# Altium PCB PCB1.PcbDoc (part 2 of 2)
Units mil, origin at the board's own origin, x right, y up, seen from the top; angles counter-clockwise.
Board outline 3935 x 3935 mil, 2 copper layers (Top Layer, Bottom Layer); 151 components, 133 nets, 573 pads, 224 vias.
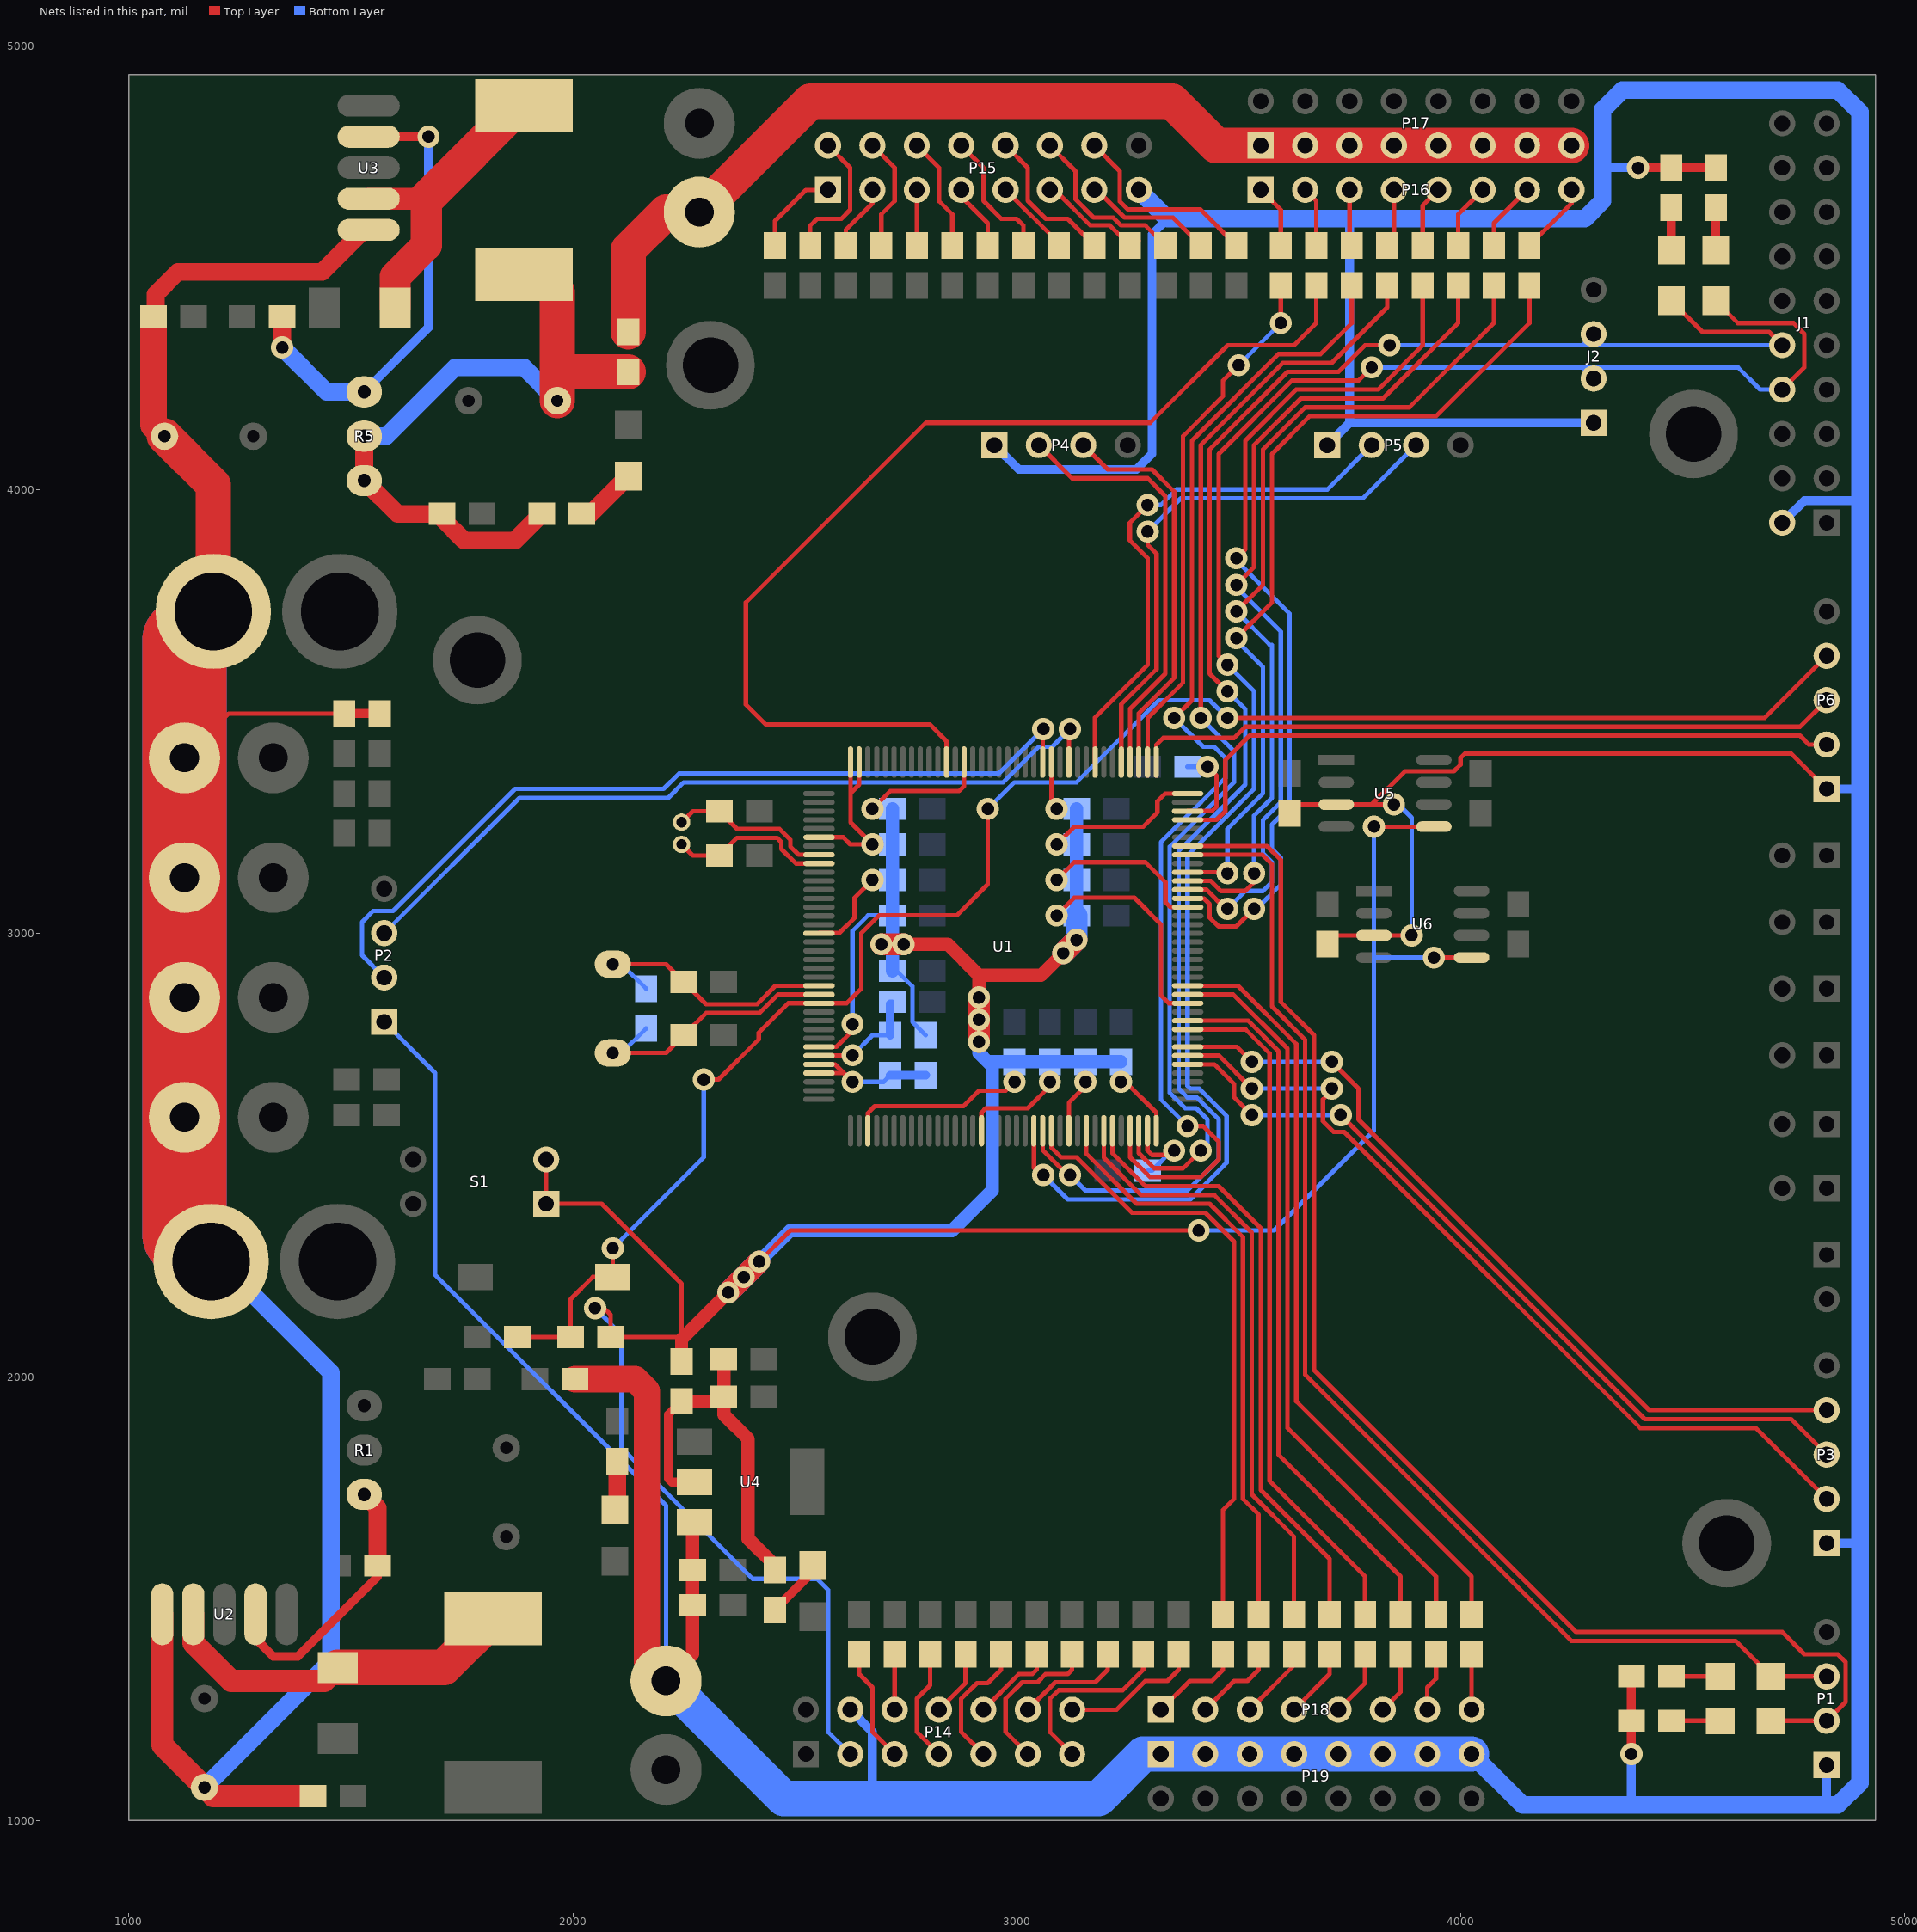
[diagram p2: the nets of this part, all layers, seen from the top]

## Via types
v1: diameter 50, hole 28, Top Layer to Bottom Layer, tented both sides, 126 vias
v2: diameter 30, hole 20, Top Layer to Bottom Layer, tented both sides, 98 vias

## Nets (pads, with @x,y where several pads share a name; then routed paths per layer and width w, separated by ;. In a path a pad name is that pad's centre, name@x,y a point inside that pad or via, vN(x,y) a via of type N, cw(c..) or ccw(c..) an arc to the next point about the centre after c; other vN are vias at no path point) (continued)
NetC7_1: C7.1 C8.1 L2.2 R5.2 R5.3 R7.1 R8.1 | length 1578.5
  Top Layer w20: C7.1@1705,3935 C7.1@1705,3945
  Top Layer w40: R5.2@1530,4120 R5.3@1530,4020 1605,3945 C7.1@1705,3945 ; C7.1@1705,3935 1755,3885 1870,3885 R7.1@1930,3945
  Top Layer w80: L2.2@1925,4485 1965,4445 1965,4265 ; C8.1@1965,4200 1965,4265 ; R8.1@2125,4265 1965,4265
  Bottom Layer w40: R5.2@1530,4120 1580,4120 1735,4275 1890,4275 C8.1@1965,4200
NetC11_1: C11.1 C12.2 R9.1 R65.2 U4.2 | length 870.5
  Top Layer w10: C12.2@2330,1945 C12.2@2340,1955
  Top Layer w20: R9.1@2245,1945 2215,1915 2215,1771 2223,1763 U4.2@2274,1763 ; R65.2@2455,1565 R65.2@2455,1575
  Top Layer w30: R9.1@2245,1945 C12.2@2330,1945 ; C11.1@2340,2040 C12.2@2340,1955 2340,1915 2395,1860 2395,1635 R65.2@2455,1575
NetC19_1: C19.1 R20.2 U1.23 Y1.1 | length 616.9
  Top Layer w10: Y1.1@2090,2930 2210,2930 C19.1@2250,2890 2300,2840 2415,2840 2456.42,2881.42 U1.23@2554.65,2881.42
  Bottom Layer w10: Y1.1@2090,2930 2110,2930 R20.2@2165,2875
NetC20_1: C20.1 R20.1 U1.24 Y1.2 | length 617
  Top Layer w10: Y1.2@2090,2730 2210,2730 C20.1@2250,2770 2300,2820 2420.46,2820 2462.19,2861.73 U1.24@2554.65,2861.73
  Bottom Layer w10: Y1.2@2090,2730 2110,2730 R20.1@2165,2785
NetC21_2: C21.2 U1.106 | length 212
  Top Layer w10: U1.106@3385.35,3275.12 3440.12,3275.12 3450,3285 3450,3355 v1(3430,3375)
  Bottom Layer w10: C21.2@3385,3375 v1(3430,3375)
NetC22_2: C22.2 U1.71 | length 198.7
  Top Layer w10: U1.71@3294.8,2554.65 3294.8,2510.2 3305,2500 3345,2500 v1(3355,2510)
  Bottom Layer w10: C22.2@3295,2465 3305,2465 3355,2515 v1(3355,2510)
NetC23_2: C23.2 U1.8 Y2.2 | length 369.8
  Top Layer w10: Y2.2@2245,3250 2270,3275 C23.2@2330,3275 2370,3235 2465.46,3235 2490,3210.46 2490,3195 2508.31,3176.69 U1.8@2554.65,3176.69
NetC24_2: C24.2 U1.9 Y2.1 | length 369.6
  Top Layer w10: Y2.1@2245,3200 2270,3175 C24.2@2330,3175 2370,3215 2460,3215 2470,3205 2470,3189.54 2502.54,3157.01 U1.9@2554.65,3157.01
NetD1_2: D1.2 L1.1 U2.2 | length 833
  Top Layer w50: U2.2@1145,1465 1145,1400.41 1230.41,1315 1440,1315 D1.2@1470,1345
  Top Layer w80: D1.2@1470,1345 1710,1345 L1.1@1820,1455
NetD2_1: D2.1 R3.2 | length 112.1
  Top Layer w10: D2.1@2095,1700 D2.1@2100,1705
  Top Layer w40: D2.1@2100,1705 R3.2@2100,1810
NetD3_2: D3.2 L2.1 U3.2 | length 749.5
  Top Layer w50: U3.2@1540,4655 1670,4655
  Top Layer w70: D3.2@1600,4410 1600,4480 1670,4550 1670,4655
  Top Layer w80: 1670,4655 1882.5,4867.5 L2.1@1927.5,4867.5
NetD4_1: D4.1 R7.2 | length 140.2
  Top Layer w10: R7.2@2020,3945 R7.2@2040,3945
  Top Layer w40: R7.2@2040,3945 D4.1@2125,4030
NetD5_1: D5.1 R65.1 | length 135.2
  Top Layer w10: D5.1@2540,1560 D5.1@2540,1575
  Top Layer w20: R65.1@2455,1475 D5.1@2540,1560
NetD6_1: D6.1 R66.1 | length 110
  Top Layer w10: R66.1@4475,1225 D6.1@4585,1225
NetD7_1: D7.1 R67.1 | length 110
  Top Layer w10: R67.1@4475,1325 D7.1@4585,1325
NetD8_1: D8.1 R68.1 | length 95
  Top Layer w20: D8.1@4575,4540 R68.1@4575,4635
NetD9_1: D9.1 R69.1 | length 95
  Top Layer w20: D9.1@4475,4540 R69.1@4475,4635
NetP14_5: P14.5 R25.2 | length 258.1
  Top Layer w10: R25.2@2645,1375 2645,1330 2675,1300 2675,1200 P14.5@2725,1150
NetP14_6: P14.6 R26.1 | length 125
  Top Layer w10: P14.6@2725,1250 R26.1@2725,1375
NetP14_7: P14.7 R27.2 | length 258.1
  Top Layer w10: R27.2@2805,1375 2805,1305 2775,1275 2775,1200 P14.7@2825,1150
NetP14_8: P14.8 R28.1 | length 149.9
  Top Layer w10: P14.8@2825,1250 2885,1310 R28.1@2885,1375
NetP14_9: P14.9 R29.2 | length 297.4
  Top Layer w10: P14.9@2925,1150 2875,1200 2875,1274.54 2910.46,1310 2935,1310 2965,1340 R29.2@2965,1375
NetP14_10: P14.10 R30.1 | length 192.3
  Top Layer w10: P14.10@2925,1250 3005,1330 3035,1330 3045,1340 R30.1@3045,1375
NetP14_11: P14.11 R31.2 | length 357.4
  Top Layer w10: P14.11@3025,1150 2975,1200 2975,1274.54 3012.46,1312 3047,1312 3065,1330 3115,1330 3125,1340 R31.2@3125,1375
NetP14_12: P14.12 R32.1 | length 252.3
  Top Layer w10: P14.12@3025,1250 3087,1312 3177,1312 3205,1340 R32.1@3205,1375
NetP14_13: P14.13 R33.2 | length 417.4
  Top Layer w10: P14.13@3125,1150 3075,1200 3075,1274.54 3094.46,1294 3239,1294 3285,1340 R33.2@3285,1375
NetP14_14: P14.14 R34.1 | length 312.3
  Top Layer w10: P14.14@3125,1250 3225,1250 3290,1315 3340,1315 3365,1340 R34.1@3365,1375
NetP15_1: P15.1 R35.2 | length 208.1
  Top Layer w10: R35.2@2465,4550 2455,4560 2455,4605 2525,4675 P15.1@2575,4675
NetP15_2: P15.2 R36.1 | length 315.2
  Top Layer w10: R36.1@2535,4550 2535,4595 2550,4610 2605,4610 2625,4630 2625,4725 P15.2@2575,4775
NetP15_3: P15.3 R37.2 | length 149.9
  Top Layer w10: R37.2@2615,4550 2615,4585 2675,4645 P15.3@2675,4675
NetP15_4: P15.4 R38.1 | length 258.1
  Top Layer w10: P15.4@2675,4775 2725,4725 2725,4650 2695,4620 R38.1@2695,4550
NetP15_5: P15.5 R39.2 | length 125
  Top Layer w10: R39.2@2775,4550 P15.5@2775,4675
NetP15_6: P15.6 R40.1 | length 258.1
  Top Layer w10: P15.6@2775,4775 2825,4725 2825,4650 2855,4620 R40.1@2855,4550
NetP15_7: P15.7 R41.2 | length 149.9
  Top Layer w10: P15.7@2875,4675 2875,4660 2935,4600 R41.2@2935,4550
NetP15_8: P15.8 R42.1 | length 303.2
  Top Layer w10: P15.8@2875,4775 2925,4725 2925,4650.46 2965.46,4610 3000,4610 3015,4595 R42.1@3015,4550
NetP15_9: P15.9 R43.2 | length 174.7
  Top Layer w10: P15.9@2975,4675 3095,4555 R43.2@3095,4550
NetP15_10: P15.10 R44.1 | length 336.9
  Top Layer w10: P15.10@2975,4775 3025,4725 3025,4650.46 3065.46,4610 3115,4610 R44.1@3175,4550
NetP15_11: P15.11 R45.2 | length 245.9
  Top Layer w10: P15.11@3075,4675 3085.91,4675 3165.91,4595 3210,4595 R45.2@3255,4550 ; R45.2@3265,4570 R45.2@3275,4560
NetP15_12: P15.12 R46.1 | length 390.5
  Top Layer w10: P15.12@3075,4775 3132.47,4717.53 3132.47,4653.9 3173.37,4613 3217.46,4613 3235.46,4595 3290,4595 R46.1@3335,4550
NetP15_13: P15.13 R47.2 | length 291.8
  Top Layer w10: P15.13@3175,4675 3180.91,4675 3242.91,4613 3352,4613 R47.2@3415,4550
NetP15_14: P15.14 R48.1 | length 453.4
  Top Layer w10: P15.14@3175,4775 3232.47,4717.53 3232.47,4648.9 3250.37,4631 3414,4631 R48.1@3495,4550
NetP16_1: P16.1 R49.2 | length 143.6
  Top Layer w10: P16.1@3550,4675 3595,4630 R49.2@3595,4550
NetP16_2: P16.2 R50.2 | length 135.4
  Top Layer w10: P16.2@3650,4675 3675,4650 R50.2@3675,4550
NetP16_3: P16.3 R51.2 | length 127.1
  Top Layer w10: P16.3@3750,4675 3750,4555 R51.2@3755,4550
NetP16_4: P16.4 R52.2 | length 131.2
  Top Layer w10: R52.2@3835,4550 3850,4565 P16.4@3850,4675
NetP16_5: P16.5 R53.2 | length 139.5
  Top Layer w10: R53.2@3915,4550 3915,4640 P16.5@3950,4675
NetP16_6: P16.6 R54.2 | length 147.8
  Top Layer w10: R54.2@3995,4550 3995,4620 P16.6@4050,4675
NetP16_7: P16.7 R55.2 | length 156.1
  Top Layer w10: R55.2@4075,4550 4075,4600 P16.7@4150,4675
NetP16_8: P16.8 R56.2 | length 164.4
  Top Layer w10: R56.2@4155,4550 4250,4645 P16.8@4250,4675
NetP18_1: P18.1 R57.2 | length 212.3
  Top Layer w10: P18.1@3325,1250 3390,1315 3440,1315 3465,1340 R57.2@3465,1375
NetP18_2: P18.2 R58.2 | length 192.3
  Top Layer w10: P18.2@3425,1250 3490,1315 3520,1315 3545,1340 R58.2@3545,1375
NetP18_3: P18.3 R59.2 | length 151.4
  Top Layer w10: P18.3@3525,1250 R59.2@3625,1350 ; R59.2@3625,1365 R59.2@3625,1375
NetP18_4: P18.4 R60.2 | length 158.1
  Top Layer w10: P18.4@3625,1250 3705,1330 R60.2@3705,1375
NetP18_5: P18.5 R61.2 | length 149.9
  Top Layer w10: P18.5@3725,1250 3785,1310 R61.2@3785,1375
NetP18_6: P18.6 R62.2 | length 141.6
  Top Layer w10: P18.6@3825,1250 3865,1290 R62.2@3865,1375
NetP18_7: P18.7 R63.2 | length 133.3
  Top Layer w10: P18.7@3925,1250 3925,1300 3945,1320 R63.2@3945,1375
NetP18_8: P18.8 R64.2 | length 110
  Top Layer w10: P18.8@4025,1250 R64.2@4025,1360
NetR1_1: R1.1 R2.2 U2.4 | length 618.6
  Top Layer w10: U2.4@1285,1410 U2.4@1285,1465
  Top Layer w20: U2.4@1285,1410 1325,1370 1380,1370 1560,1550 R2.2@1560,1575
  Top Layer w40: R1.1@1530,1735 1560,1705 R2.2@1560,1575
NetR5_1: R5.1 R6.2 U3.4 | length 1051.5
  Top Layer w20: U3.4@1540,4795 v1(1675,4795)
  Top Layer w40: v1(1345,4320) R6.2@1345,4375
  Bottom Layer w20: R5.1@1530,4220 1675,4365 v1(1675,4795)
  Bottom Layer w40: v1(1345,4320) 1445,4220 R5.1@1530,4220
RST: C15.1 P6.4 R12.1 S2.2 U1.25 | length 3990.9
  Top Layer w10: C15.1@1875,2090 R12.1@1995,2090 1995,2175 2045,2225 S2.2@2090,2225 v1(2090,2290) ; v1(2295,2670) 2328.18,2670 2419,2760.82 2419,2775.82 2485.22,2842.05 U1.25@2554.65,2842.05 2617.05,2842.05 2650,2875 2650,3000 2690,3040 2865,3040 2935,3110 v1(2935,3280) ; v1(3475,3485) 4685,3485 P6.4@4825,3625
  Bottom Layer w10: v1(2090,2290) 2295,2495 v1(2295,2670) ; v1(2935,3280) 2995,3340 3135,3340 3320,3525 3435,3525 v1(3475,3485)
SWCLK: P6.3 U1.109 | length 1591.3
  Top Layer w10: U1.109@3314.49,3385.35 3314.49,3424.49 3330,3440 3490,3440 3515,3465 4765,3465 P6.3@4825,3525
SWDIO: P6.2 U1.105 | length 1593.8
  Top Layer w10: U1.105@3385.35,3255.43 3450.43,3255.43 3470,3275 3470,3390 3525,3445 4765,3445 4785,3425 P6.2@4825,3425
TIM1_CH1: R57.1 U1.60 | length 1387.7
  Top Layer w10: U1.60@3078.27,2554.65 3078.27,2516.73 3100,2495 3135,2495 3260,2370 3425,2370 3490,2305 3490,1725 3465,1700 R57.1@3465,1465
TIM1_CH2: R58.1 U1.64 | length 1347
  Top Layer w10: U1.64@3157.01,2554.65 3157.01,2502.99 3270,2390 3435,2390 3510,2315 3510,1725 3545,1690 R58.1@3545,1465
TIM1_CH3: R59.1 U1.66 | length 1363.8
  Top Layer w10: U1.66@3196.38,2554.65 3196.38,2493.62 3280,2410 3445,2410 3530,2325 3530,1735 3625,1640 R59.1@3625,1465
TIM1_CH4: R60.1 U1.67 | length 1388.8
  Top Layer w10: U1.67@3216.06,2554.65 3216.06,2503.94 3290,2430 3455,2430 3550,2335 3550,1745 3705,1590 R60.1@3705,1465
TIM2_CH1: R49.1 U1.110 | length 1199
  Top Layer w10: U1.110@3294.8,3385.35 3295,3385.55 3295,3485 3375,3565 3375,4120 3465,4210 3465,4245 v1(3500,4280) ; v1(3595,4375) R49.1@3595,4460
  Bottom Layer w10: v1(3500,4280) v1(3595,4375)
TIM2_CH2: R50.1 U1.133 | length 2394.6
  Top Layer w10: U1.133@2842.05,3385.35 2842.05,3432.95 2805,3470 2435,3470 2390,3515 2390,3745 2795,4150 3300.46,4150 3475.46,4325 3625,4325 3675,4375 R50.1@3675,4460
TIM2_CH3: R51.1 U1.69 | length 2682.4
  Top Layer w10: U1.69@3255.43,2554.65 3255.43,2495.02 3300.46,2450 3415,2450 3455,2490 3455,2530 3420,2565 v1(3385,2565) ; v1(3355,3485) 3395,3525 3395,4110 3590,4305 3685,4305 3755,4375 R51.1@3755,4460
  Bottom Layer w10: v1(3355,3485) 3420,3420 3445,3420 3470,3395 3470,3350 3325,3205 3325,2625 v1(3385,2565)
TIM2_CH4: R52.1 U1.70 | length 2579.5
  Top Layer w10: U1.70@3275.12,2554.65 3275.12,2504.43 3309.54,2470 3375,2470 v1(3415,2510) ; v1(3415,3485) 3415,4100 3600,4285 3710,4285 3835,4410 R52.1@3835,4460
  Bottom Layer w10: v1(3415,2510) 3420,2510 3430,2500 3430,2580 3405,2605 3380,2605 3345,2640 3345,3195 3490,3340 3490,3410 v1(3415,3485)
TIM3_CH1: R53.1 U1.96 | length 2000.1
  Top Layer w10: U1.96@3385.35,3078.27 3422.08,3078.27 3435,3065.35 3435,3035 3455,3015 3495,3015 v1(3535,3055) ; v1(3495,3845) 3515,3865 3515,4110 3630,4225 3815,4225 3915,4325 R53.1@3915,4460
  Bottom Layer w10: v1(3495,3845) 3495,3840 3615,3720 3615,3285 3575,3245 3575,3190 3595,3170 3595,3109.54 3540.46,3055 v1(3535,3055)
TIM3_CH2: R54.1 U1.97 | length 1959
  Top Layer w10: U1.97@3385.35,3097.95 3427.85,3097.95 3470.8,3055 v1(3475,3055) ; v1(3495,3785) 3535,3825 3535,4100 3640,4205 3825,4205 3995,4375 R54.1@3995,4460
  Bottom Layer w10: v1(3475,3055) 3515,3095 3555,3095 3575,3115 3575,3160 3555,3180 3555,3255 3595,3295 3595,3680 3495,3780 v1(3495,3785)
TIM3_CH3: R55.1 U1.98 | length 1942.8
  Top Layer w10: U1.98@3385.35,3117.64 3437.36,3117.64 3460,3095 3515,3095 3535,3115 v1(3535,3135) ; v1(3495,3725) 3555,3785 3555,4090 3650,4185 3885,4185 4075,4375 R55.1@4075,4460
  Bottom Layer w10: v1(3495,3725) 3570,3650 3575,3650 3575,3305 3535,3265 v1(3535,3135)
TIM3_CH4: R56.1 U1.99 | length 1908
  Top Layer w10: U1.99@3385.35,3137.32 v1@3470,3137.32 ; v1(3495,3665) 3575,3745 3575,4080 3660,4165 3945,4165 4155,4375 R56.1@4155,4460
  Bottom Layer w10: v1(3475,3135) 3475,3235 3555,3315 3555,3600 3495,3660 v1(3495,3665)
TIM4_CH1: R61.1 U1.81 | length 1559.9
  Top Layer w10: U1.81@3385.35,2782.99 3515.75,2782.99 3570,2728.74 3570,1765 3785,1550 R61.1@3785,1465
TIM4_CH2: R62.1 U1.82 | length 1616.1
  Top Layer w10: U1.82@3385.35,2802.68 3521.52,2802.68 3590,2734.2 3590,1825 3865,1550 R62.1@3865,1465
TIM4_CH3: R63.1 U1.85 | length 1688.8
  Top Layer w10: U1.85@3385.35,2861.73 3488.27,2861.73 3610,2740 3610,1885 3945,1550 R63.1@3945,1465
TIM4_CH4: R64.1 U1.86 | length 1747.7
  Top Layer w10: U1.86@3385.35,2881.42 3498.58,2881.42 3630,2750 3630,1945 4025,1550 R64.1@4025,1465
UART4_RX: P4.2 U1.112 | length 965.2
  Top Layer w10: P4.2@3050,4100 3125,4025 3295,4025 3335,3985 3335,3585 3255.43,3505.43 U1.112@3255.43,3385.35
UART4_TX: P4.3 U1.111 | length 891.2
  Top Layer w10: P4.3@3150,4100 3205,4045 3305,4045 3355,3995 3355,3575 3275.12,3495.12 U1.111@3275.12,3385.35
UART5_RX: P5.2 U1.116 | length 1222.7
  Top Layer w10: U1.116@3176.69,3385.35 3176.69,3486.24 3295,3604.54 3295,3845 3255,3885 3255,3925 v1(3295,3965)
  Bottom Layer w10: v1(3295,3965) 3325,3965 3360,4000 3700,4000 P5.2@3800,4100
UART5_TX: P5.3 U1.113 | length 1246.5
  Top Layer w10: U1.113@3235.75,3385.35 3235.75,3515.75 3315,3595 3315,3855 3295,3875 v1(3295,3905)
  Bottom Layer w10: v1(3295,3905) 3370,3980 3780,3980 P5.3@3900,4100
UART7_RX: D8.2 J1.8 J2.2 U1.58 | length 4106.1
  Top Layer w10: U1.58@3038.9,2554.65 3038.9,2471.1 3055,2455 v1(3060,2455) ; v1(3475,3605) 3455,3625 3455,4080 3620,4245 3770,4245 v1(3800,4275) ; D8.2@4575,4425 4625,4375 4750,4375 4775,4350 4775,4275 J1.8@4725,4225
  Bottom Layer w10: v1(3060,2455) 3115,2400 3391.25,2400 3467,2475.75 3467,2476.54 3473,2482.54 3473,2587.91 3410.91,2650 3391.25,2650 3385,2656.25 3385,3175 3535,3325 3535,3545 v1(3475,3605) ; v1(3800,4275) 4275,4275 ; J2.2@4300,4250 4275,4275 ; J1.8@4725,4225 4675,4225 4625,4275 4275,4275
UART7_TX: D9.2 J1.10 J2.3 U1.59 | length 3980.4
  Top Layer w10: U1.59@3058.58,2554.65 3058.58,2510.96 3114.54,2455 v1(3120,2455) ; v1(3475,3545) 3435,3585 3435,4090 3610,4265 3725,4265 3785,4325 v1(3840,4325) ; D9.2@4460,4425 D9.2@4475,4425 4545,4355 4695,4355 J1.10@4725,4325
  Bottom Layer w10: v1(3120,2455) 3155,2420 3385,2420 3455,2490 3455,2580.46 3405.46,2630 3385,2630 3365,2650 3365,3185 3515,3335 3515,3505 v1(3475,3545) ; v1(3840,4325) 4275,4325 ; J2.3@4300,4350 4275,4325 ; J1.10@4725,4325 4275,4325
USART1_RX: D6.2 P1.2 U1.102 | length 3148.7
  Top Layer w10: U1.102@3385.35,3196.38 3563.62,3196.38 3595,3165 3595,2845 3670,2770 3670,2015 4260,1425 4725,1425 4775,1375 4850,1375 4867.53,1357.47 4867.53,1267.53 P1.2@4825,1225 D6.2@4700,1225
USART1_TX: D7.2 P1.3 U1.101 | length 2836.4
  Top Layer w10: U1.101@3385.35,3176.69 3553.31,3176.69 3575,3155 3575,2835 3650,2760 3650,2005 4250,1405 4620,1405 D7.2@4700,1325 P1.3@4825,1325
USART2_RX: P2.2 U1.122 | length 1935.5
  Top Layer w10: U1.122@3058.58,3385.35 v1@3058.58,3460
  Bottom Layer w10: P2.2@1575,2900 1525,2950 1525,3025 1550,3050 1595,3050 1870,3325 2204.54,3325 2239.54,3360 2960,3360 v1(3060,3460)
USART2_TX: P2.3 U1.119 | length 1802.8
  Top Layer w10: U1.119@3117.64,3385.35 v1@3117.64,3452.64
  Bottom Layer w10: P2.3@1575,3000 1880,3305 2215,3305 2250,3340 2969.54,3340 3049.54,3420 3080,3420 v1(3120,3460)
USART3_CK: P3.4 U1.79 | length 1819.7
  Top Layer w10: U1.79@3385.35,2743.62 3496.38,2743.62 v1(3530,2710) ; v1(3710,2710) 3770,2650 3770,2580 4425,1925 P3.4@4825,1925
  Bottom Layer w10: v1(3530,2710) v1(3710,2710)
USART3_RX: P3.2 U1.78 | length 1924.9
  Top Layer w10: U1.78@3385.35,2723.94 3456.06,2723.94 v1(3530,2650) ; v1(3710,2650) 3710,2645 3690,2625 3690,2576.26 3714.26,2552 3738,2552 4405,1885 4665,1885 P3.2@4825,1725
  Bottom Layer w10: v1(3530,2650) v1(3710,2650)
USART3_TX: P3.3 U1.77 | length 1821.4
  Top Layer w10: U1.77@3385.35,2704.25 3445.75,2704.25 3490,2660 3490,2630 v1(3530,2590) ; v1(3730,2590) 4415,1905 4745,1905 P3.3@4825,1825
  Bottom Layer w10: v1(3530,2590) v1(3730,2590)
VCC_5V: C9.1 C10.2 C25.1 C26.1 J1.2 J2.1 P1.1 P2.1 P3.1 P4.1 P5.1 P6.1 P14.4 P15.15 P19.1 P19.3 P19.5 P19.7 P19.9 P19.11 P19.13 P19.15 R4.2 R66.2 R67.2 R68.2 R69.2 U4.3 U5.3 U6.3 X8.1 | length 16655.8
  Top Layer w10: U4.3@2270,1668.45 U4.3@2274,1672.45 ; C25.1@3615,3270 3635,3290 U5.3@3720,3290 3800,3290 ; C26.1@3700,2975 3720,2995 U6.3@3805,2995 v1(3890,2995) ; v1(3850,3290) 3800,3290 ; P6.1@4825,3325 4824.54,3325 4744.54,3405 4010,3405 4000,3395 4000,3380 3985,3365 3875,3365 3800,3290
  Top Layer w20: v1(4385,1150) R66.2@4385,1225 R67.2@4385,1325 ; v1(4400,4725) R69.2@4475,4725 R68.2@4575,4725
  Top Layer w30: X8.1@2210,1315 2270,1375 C10.2@2270,1485 C9.1@2270,1565 U4.3@2270,1668.45
  Top Layer w60: R4.2@2005,1995 2140,1995 2167,1968 2167,1358 X8.1@2210,1315
  Bottom Layer w10: P2.1@1575,2800 1690,2685 1690,2230 2210,1710 X8.1@2210,1315 ; v1(3850,3290) 3860,3290 3890,3260 v1(3890,2995)
  Bottom Layer w20: P14.4@2625,1250 2675,1200 2675,1050 ; P4.1@2950,4100 3005,4045 3270,4045 3305,4080 3305,4575 3340,4610 ; P5.1@3700,4100 3750,4150 ; 3750,4610 3750,4150 ; J2.1@4300,4150 3750,4150 ; 4320,4725 v1(4400,4725) ; 4385,1035 v1(4385,1150) ; J1.2@4725,3925 4775,3975 4900,3975 ; 4825,1035 P1.1@4825,1125 ; P3.1@4825,1625 4900,1625 ; P6.1@4825,3325 4900,3325
  Bottom Layer w40: P15.15@3275,4675 3340,4610 3750,4610 4280,4610 4320,4650 4320,4725 4320,4855 4365,4900 4850,4900 4900,4850 4900,3975 4900,3325 4900,1625 4900,1085 4850,1035 4825,1035 4385,1035 4140,1035 P19.15@4025,1150
  Bottom Layer w80: X8.1@2210,1315 2475,1050 2675,1050 3185,1050 3285,1150 P19.1@3325,1150 P19.3@3425,1150 P19.5@3525,1150 P19.7@3625,1150 P19.9@3725,1150 P19.11@3825,1150 P19.13@3925,1150 P19.15@4025,1150
VCC_24V: C1.1 C2.2 C5.1 C6.2 C17.2 R18.2 U2.1 U3.1 X1.1 X2.1 X3.1 X4.1 X5.1 X6.1 | length 6840.3
  Top Layer w10: X6.1@1125,3395 1225,3495 R18.2@1485,3495
  Top Layer w20: R18.2@1485,3495 C17.2@1565,3495 C17.2@1575,3495
  Top Layer w40: C6.2@1060,4385 1060,4440 1110,4490 1435,4490 U3.1@1530,4585
  Top Layer w50: U2.1@1075,1465 1075,1170 C1.1@1170,1075 1190,1055 C2.2@1415,1055
  Top Layer w60: C6.2@1055,4375 1055,4145 C5.1@1080,4120
  Top Layer w80: C5.1@1080,4120 1190,4010 X2.1@1190,3725
  Top Layer w190: X1.1@1185,2260 1125,2320 X3.1@1125,2585 X4.1@1125,2855 X5.1@1125,3125 X6.1@1125,3395 1125,3660 X2.1@1190,3725
  Bottom Layer w10: X2.1@1125,3660 X2.1@1190,3725
  Bottom Layer w40: C1.1@1170,1075 1455,1360 1455,2010 1205,2260 X1.1@1185,2260
  Bottom Layer w190: X1.1@1125,2320 X3.1@1125,2585 X4.1@1125,2855 X5.1@1125,3125 X6.1@1125,3395 X2.1@1125,3660
VCC_ADJ: P17.1 P17.3 P17.5 P17.7 P17.9 P17.11 P17.13 P17.15 R8.2 X7.1 | length 2490.2
  Top Layer w80: R8.2@2125,4355 2125,4540 2210,4625 X7.1@2285,4625 2535,4875 3350,4875 3450,4775 P17.1@3550,4775 P17.3@3650,4775 P17.5@3750,4775 P17.7@3850,4775 P17.9@3950,4775 P17.11@4050,4775 P17.13@4150,4775 P17.15@4250,4775
VDD_3V3: C14.2 C27.2 C28.2 C29.2 C30.2 C31.2 C32.2 C33.2 C34.2 C35.2 C36.2 C37.2 C38.2 P14.3 R9.2 R10.2 R12.2 S1.1 S1.2 U1.6 U1.17 U1.30 U1.39 U1.52 U1.62 U1.72 U1.84 U1.95 U1.108 U1.121 U1.131 U1.143 U1.144 U5.5 U6.5 | length 11549
  Top Layer w10: S1.2@1940,2490 S1.1@1940,2390 2065,2390 2245,2210 2245,2095 ; v1(2050,2155) 2070,2155 2085,2140 R12.2@2085,2095 ; R12.2@2085,2090 2245,2090 2245,2085 ; v1(2420,2260) 2490,2330 v1(3410,2330) ; U1.30@2554.65,2743.62 2593.62,2743.62 2630,2780 v1(2630,2795) ; U1.17@2554.65,2999.53 2555.43,3000.31 2600.76,3000.31 2635,3034.54 2635,3080 v1(2675,3120) ; U1.6@2554.65,3216.06 2608.94,3216.06 2625,3200 v1(2675,3200) 2625.51,3249.49 2625.51,3315 ; U1.144@2625.51,3385.35 2625.51,3315 ; U1.143@2645.2,3385.35 2645.2,3334.69 2625.51,3315 ; U1.39@2664.88,2554.65 2664.88,2594.88 2680,2610 2880,2610 2915,2645 2975,2645 v1(2995,2665) ; v1(2675,3280) 2715,3320 2870,3320 2881.42,3331.42 U1.131@2881.42,3385.35 ; U1.52@2920.79,2554.65 2920.79,2595.79 2930,2605 3025,2605 3075,2655 v1(3075,2665) ; U1.121@3078.27,3385.35 3078.27,3291.73 v1(3090,3280) ; v1(3090,3040) 3130,3080 3265,3080 3325,3020 3325,2860 3342.95,2842.05 U1.84@3385.35,2842.05 ; v1(3090,3120) 3130,3160 3290,3160 3335.55,3114.45 3335.55,3069.45 3346.42,3058.58 U1.95@3385.35,3058.58 ; v1(3090,3200) 3130,3240 3285,3240 3317,3272 3317,3297 3334.49,3314.49 U1.108@3385.35,3314.49 ; U1.62@3117.64,2554.65 3117.64,2617.64 3155,2655 v1(3155,2665) ; v1(3235,2665) 3245,2665 3314.49,2595.51 U1.72@3314.49,2554.65 ; v1(3805,3240) U5.5@3940,3240 ; v1(3940,2945) U6.5@4025,2945
  Top Layer w30: R9.2@2245,2035 2245,2085 v1(2350,2190) ; v1(2745,2975) 2845,2975 2915,2905 3055,2905 v1(3105,2955) ; v1(2915,2855) 2915,2895
  Top Layer w50: v1(2350,2190) v1(2385,2225) v1(2420,2260) ; v1(2695,2975) v1(2745,2975) ; v1(2915,2755) v1(2915,2805) v1(2915,2855) ; v1(3105,2955) v1(3135,2985)
  Bottom Layer w10: v1(2050,2155) 2110,2095 2110,1840 2405,1545 2550,1545 2575,1520 2575,1200 P14.3@2625,1150 ; v1(2630,2795) 2630,3005 2665,3040 C30.2@2720,3040 ; C14.2@2720,2915 2730,2915 2765,2880 2765,2800 R10.2@2795,2770 ; v1(3410,2330) 3580,2330 3805,2555 3805,2945 ; v1(3805,3240) 3805,2945 ; v1(3940,2945) 3805,2945
  Bottom Layer w30: v1(2420,2260) 2490,2330 2855,2330 2945,2420 2945,2700 2935,2710 ; C14.2@2720,2915 C30.2@2720,3040 C29.2@2720,3120 C28.2@2720,3200 C27.2@2720,3280 ; v1(2915,2755) 2915,2730 2935,2710 ; C34.2@3135,3040 C33.2@3135,3120 C32.2@3135,3200 C31.2@3135,3280 ; C38.2@3235,2710 C37.2@3155,2710 C36.2@3075,2710 C35.2@2995,2710 2935,2710
  Bottom Layer w50: v1(2350,2190) v1(2385,2225) v1(2420,2260) ; v1(2915,2755) v1(2915,2805) v1(2915,2855) ; v1(3105,2955) v1(3135,2985) C34.2@3135,3040
VDDA: C13.2 R10.1 U1.32 U1.33 | length 318.6
  Top Layer w10: U1.33@2554.65,2684.57 2610.43,2684.57 ; U1.32@2554.65,2704.25 2590.75,2704.25 2610.43,2684.57 ; v1(2630,2665) 2610.43,2684.57
  Bottom Layer w10: v1(2630,2665) 2700,2665 C13.2@2715,2680
  Bottom Layer w20: C13.2@2715,2680 R10.1@2795,2680
VSSA: C13.1 R11.1 U1.31 | length 256.5
  Top Layer w10: U1.31@2554.65,2723.94 2628.94,2723.94 v1(2630,2725)
  Bottom Layer w10: v1(2630,2725) 2675,2770 C13.1@2715,2770 ; R11.1@2715,2840 R11.1@2720,2845
  Bottom Layer w20: C13.1@2715,2770 R11.1@2715,2840
pads on no net: J1.1 J1.3 J1.4 J1.5 J1.7 J1.9 J1.11 J1.12 J1.13 J1.14 J1.15 J1.16 J1.17 J1.18 J1.19 J1.20 U1.1 U1.2 U1.3 U1.4 U1.5 U1.7 U1.10 U1.11 U1.12 U1.49 U1.50 U1.53 U1.54 U1.55 U1.56 U1.57 U1.63 U1.65 U1.68 U1.75 U1.76 U1.80 U1.87 U1.88 U1.89 U1.90 U1.91 U1.92 U1.93 U1.100 U1.114 U1.115 U1.117 U1.118 U1.123 U1.124 U1.125 U1.126 U1.127 U1.128 U1.129 U1.132 U1.134 U1.135 U1.136 U1.137 U1.139 U1.140 U1.141 U1.142 U4.4
copper on no net: | length 124.2
  Top Layer w50: 1162.5,1612.5 1215,1560
  Bottom Layer w10: 1210,4545 1260,4545
  other v2: 1065,1645 1115,1645 1165,1645 1215,1645 1265,1645 1315,1645 1365,1645 1065,1695 1115,1695 1165,1695 1215,1695 1265,1695 1315,1695 1365,1695 1065,1745 1115,1745 1165,1745 1215,1745 1265,1745 1315,1745 1365,1745 1065,1795 1115,1795 1165,1795 1215,1795 1265,1795 1315,1795 1365,1795 1065,1845 1115,1845 1165,1845 1215,1845 1265,1845 1315,1845 1365,1845 1065,1895 1115,1895 1165,1895 1215,1895 1265,1895 1315,1895 1365,1895 1065,1945 1115,1945 1165,1945 1215,1945 1265,1945 1315,1945 1365,1945 1060,4575 1110,4575 1160,4575 1210,4575 1260,4575 1310,4575 1360,4575 1060,4625 1110,4625 1160,4625 1210,4625 1260,4625 1310,4625 1360,4625 1060,4675 1110,4675 1160,4675 1210,4675 1260,4675 1310,4675 1360,4675 1060,4725 1110,4725 1160,4725 1210,4725 1260,4725 1310,4725 1360,4725 1060,4775 1110,4775 1160,4775 1210,4775 1260,4775 1310,4775 1360,4775 1060,4825 1110,4825 1160,4825 1210,4825 1260,4825 1310,4825 1360,4825 1060,4875 1110,4875 1160,4875 1210,4875 1260,4875 1310,4875 1360,4875

## Polygon pours and split planes (outlines as drawn)
GND on Bottom Layer "NONET_L01_P-001" (solid, remove dead copper, pour order 58): 4935,4935 4935,1010 4935,1000 1000,1000 1000,4935 4935,4935 3340,3340 3340,2600 2600,2600 2600,3340 3340,3340
GND on Top Layer "NONET_L01_P-001" (solid, remove dead copper, pour order 64): 4935,4935 4935,1000 1000,1000 1000,4935 4935,4935 3430,3430 3430,2510 2510,2510 2510,3430 3430,3430

## Keep-outs
Keep-Out Layer:
  the board outline again, w10

## Other copper
Top Layer:
  text "V1.0" at 3025,2064.91 h100
  text "夏宇彬" at 2981.62,1965 h100

## Silkscreen, mask and mechanical layers (free items; w line width, h text height)
Top Overlay:
  text "UART7_TX" at 4420,4320 h40 r90
  text "UART7_RX" at 4665,4320 h40 r90
  text "+" at 1060,4165 h60
  text "+" at 1945,4095 h60
  text "RXTXG" at 3020,3975 h60
  text "RXTXG" at 3770,3975 h60
  text "12  IN15 14" at 2460.07,3895 h32 r90
  text "123 IN13 12" at 2515.06,3895 h32 r90
  text "123 IN11 10" at 2570.05,3895 h32 r90
  text "3  IN15 14" at 2625.04,3895 h32 r90
  text "3  IN9 8" at 2680.03,3895 h32 r90
  text "3  IN7 6" at 2735.02,3895 h32 r90
  text "3  IN5 4" at 2790.01,3895 h32 r90
  text "5V GND" at 2845,3895 h32 r90
  text "GND" at 4624.97,3705 h50
  text "图书馆自主还书系统" at 1990,3610 h300
  text "RST" at 4624.97,3603.75 h50
  text "SWCLK" at 4525,3502.5 h50
  text "SWDIO" at 4533.33,3401.25 h50
  text "5V" at 4674.95,3300 h50
  text "CAN1_L" at 4580,3005 h40 r90
  text "CAN1_H" at 4925,3005 h40 r90
  text "RXTXG" at 1700,2875 h60 r90
  text "BOOT1" at 1995,2460 h60
  text "BOOT0" at 1995,2360 h60
  text "CAN2_H" at 4450,2250 h40
  text "RST" at 2155,2200 h60
  text "CAN2_L" at 4450,2160 h40
  text "+" at 1905,1810 h60
  text "ADC123" at 2648.14,1710 h32 r90
  text "GND GND" at 2701.26,1710 h32 r90
  text "3V3 5V" at 2754.38,1710 h32 r90
  text "IN0 IN1" at 2807.51,1710 h32 r90
  text "IN2 IN3" at 2860.63,1710 h32 r90
  text "OUT1 OUT2" at 2913.75,1710 h32 r90
  text "IN6 IN7" at 2966.88,1710 h32 r90
  text "IN8 IN9" at 3020,1710 h32 r90
  text "TIM1_CH1-4 TIM4_CH1-4" at 3425,1700 h32
  text "5VRXTXCK" at 4755,1575 h50 r90
  text "USART1_TX" at 4340,1455 h40
  text "USART1_RX" at 4340,1055 h40
  text "+" at 1075,1045 h60
Bottom Overlay:
  lines w10: 2605.35,2614.57 2605.35,2604.57 ; 2615,3335 2605,3335 ; 2950,2970 2990,2970 ; 2970,2950 2970,2990 ; 3325,2605 3335,2605 3335,2615 ; 3325,3335 3335,3335 3335,3325 ; 2605,3335 2605,3325 2605,3335 ; 2605.35,2604.57 2615.35,2604.57 2605.35,2604.57
Top Solder:
  text "2019/6/27" at 2918.67,2149.73 h100
Bottom Solder:
  rectangle: 1000,4525 1410,4935
  rectangle: 1015,1595 1415,2000
  lines w190: 1125,2320 1125,3660 ; 1470,2350 1325,2495 1325,3395 1475,3545 1475,3630

## Text inside footprints (layer, text, board x,y; h text height)
D2: Top Overlay "+" at 2130,1705 h30 r270
D4: Top Overlay "+" at 2090,4025 h30 r90
D5: Top Overlay "+" at 2575,1580 h30 r270
D6: Top Overlay "+" at 4580,1260 h30
D7: Top Overlay "+" at 4580,1360 h30
D8: Top Overlay "+" at 4610,4545 h30 r270
D9: Top Overlay "+" at 4510,4545 h30 r270
J1: Top Overlay "2" at 4745,3825 h50 r90; Top Overlay "1" at 4845,3825 h50 r90; Top Overlay "19" at 4920,4870 h32 r90; Top Overlay "20" at 4660,4865 h32 r90
P14: Top Overlay "2" at 2430,1225 h50; Top Overlay "1" at 2440,1125 h50; Top Overlay "14" at 3185,1245 h32; Top Overlay "13" at 3185,1135 h32
P15: Top Overlay "2" at 2475,4755 h50; Top Overlay "1" at 2475,4655 h50; Top Overlay "15" at 3335,4655 h50; Top Overlay "16" at 3335,4755 h50
P17: Top Overlay "2" at 3450,4855 h50; Top Overlay "1" at 3450,4755 h50; Top Overlay "15" at 4310,4755 h50; Top Overlay "16" at 4310,4855 h50
P19: Top Overlay "2" at 3230,1030 h50; Top Overlay "1" at 3245,1125 h50; Top Overlay "15" at 4085,1125 h50; Top Overlay "16" at 4085,1025 h50
X1: Top Overlay "+" at 1045,2345 h60
X2: Top Overlay "+" at 1050,3810 h60
X3: Top Overlay "+" at 1035,2635 h60
X4: Top Overlay "+" at 1035,2905 h60
X5: Top Overlay "+" at 1035,3175 h60
X6: Top Overlay "+" at 1035,3445 h60
X7: Top Overlay "+" at 2235,4535 h60 r90
X8: Top Overlay "+" at 2260,1405 h60 r270